# EAGLE board driver_ckt_led_v2 (EAGLE 6.6.0)
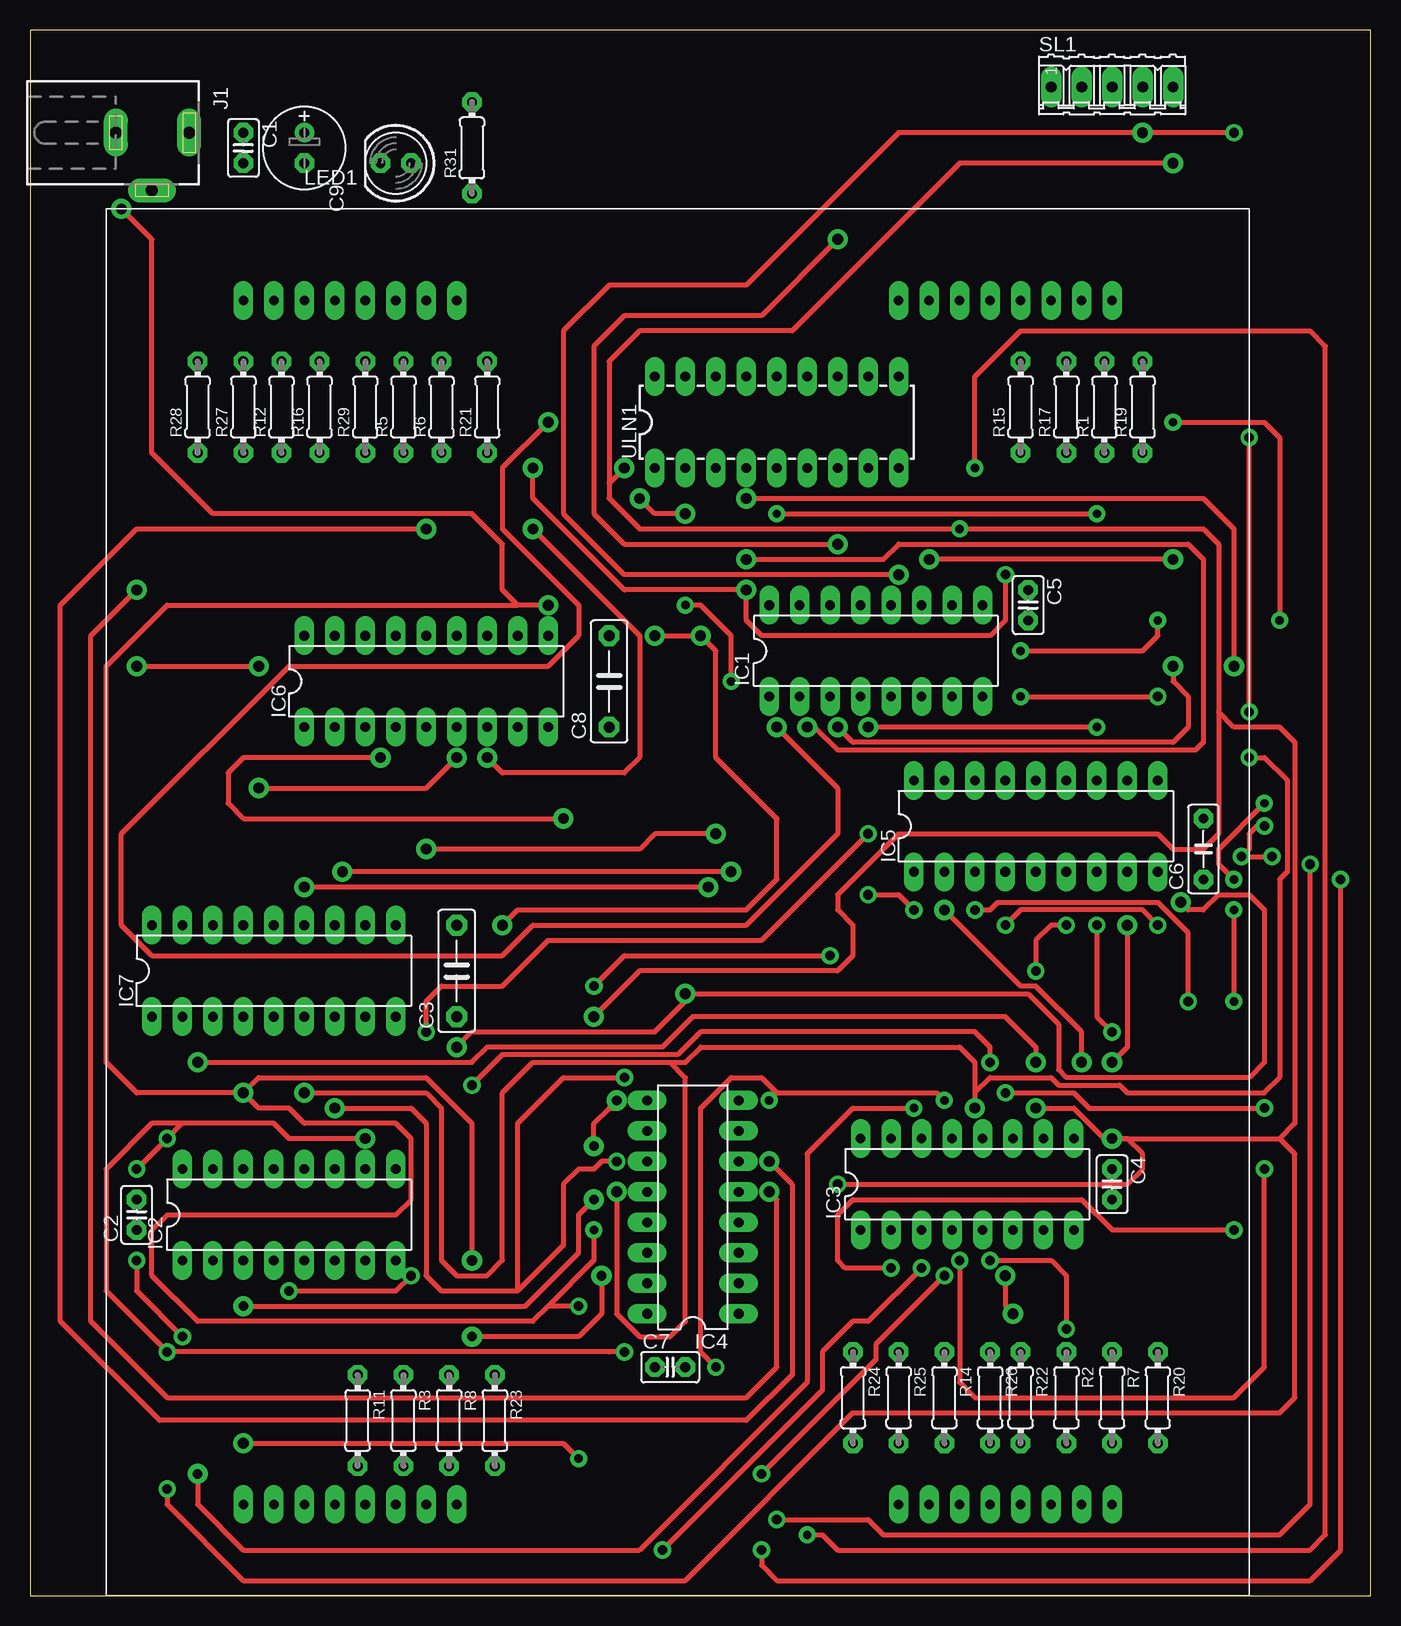
[diagram p0: board, top side]
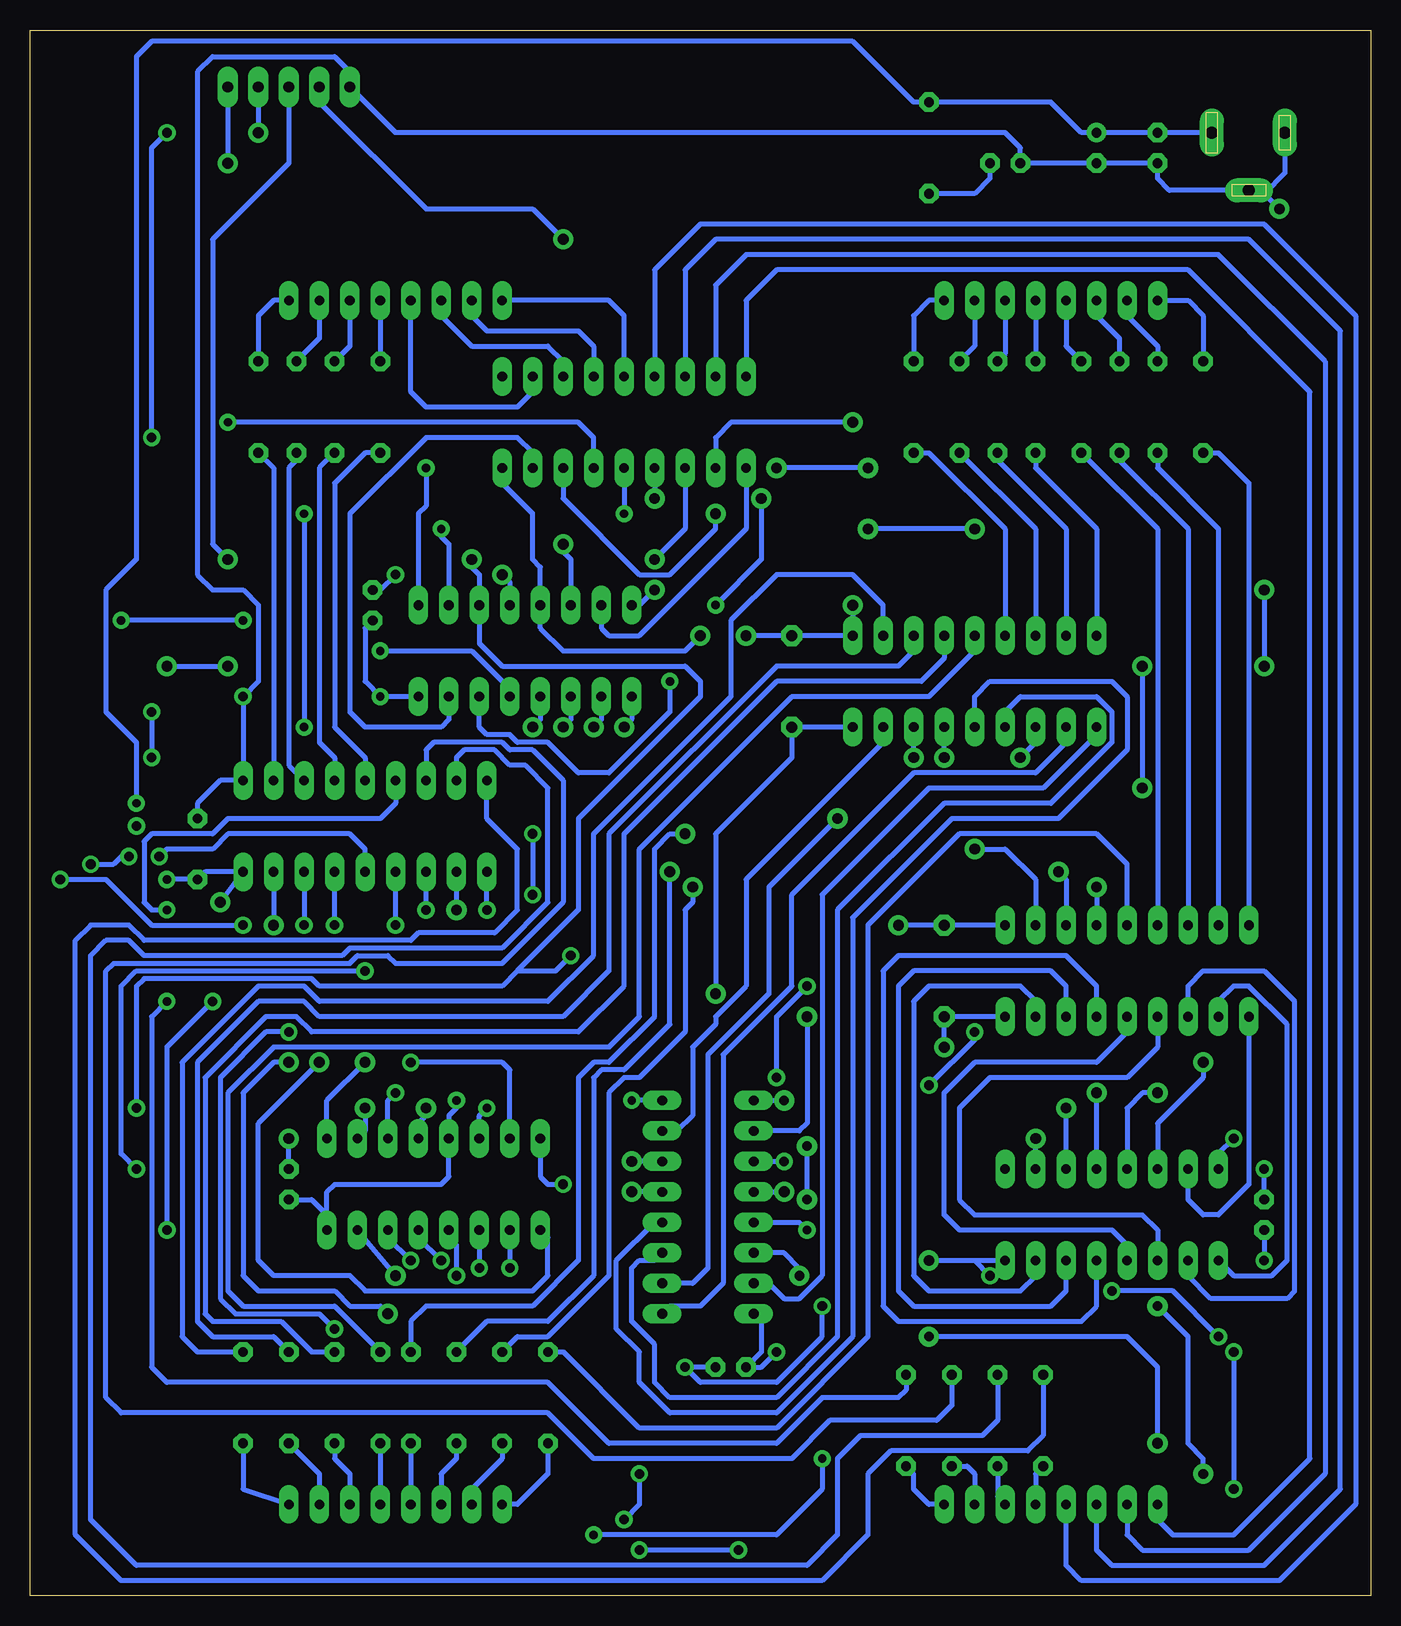
[diagram p1: board, bottom side, seen from below]

Size 111.74 x 130.48 mm. Coordinates in mm from the lower left corner, seen from the top.
Outline: 0,0 111.74,0 111.74,130.48 0,130.48 0,0
Copper layers (1*16): Top 0.035mm / dielectric 1.5mm / Bottom 0.035mm
Design rules "default *": minimum track width 10mil, minimum drill 24mil, track to track 8mil, track to pad 8mil, pad to pad 8mil, via to via 8mil, smd to smd 8mil, copper to edge 40mil, drill to drill 8mil, minimum pad ring 16mil, minimum via ring 8mil, stop-mask expansion 4mil, vias tented up to drill 0mil, thermal gap 10mil

## Footprints (pad centres in the part's own frame; a part is rotated, then mirrored left to right if it is on the bottom)
C025-025X050 = drill 0.813 octagon: 1 -1.27,0; 2 1.27,0
C075-032X103 = drill 0.914 octagon: 1 -3.81,0; 2 3.81,0
C050-025X075 = drill 0.813 octagon: 1 -2.54,0; 2 2.54,0
E2,5-7 = drill 0.813 pad 1.6: + -1.27,0 | drill 0.813 pad 1.6 octagon: - 1.27,0
DIL16 = drill 0.813 long: 1 -8.89,-3.81; 2 -6.35,-3.81; 3 -3.81,-3.81; 4 -1.27,-3.81; 5 1.27,-3.81; 6 3.81,-3.81; 7 6.35,-3.81; 8 8.89,-3.81; 9 8.89,3.81; 10 6.35,3.81; 11 3.81,3.81; 12 1.27,3.81; 13 -1.27,3.81; 14 -3.81,3.81; 15 -6.35,3.81; 16 -8.89,3.81
DIL18 = drill 0.813 long: 1 -10.16,-3.81; 2 -7.62,-3.81; 3 -5.08,-3.81; 4 -2.54,-3.81; 5 0,-3.81; 6 2.54,-3.81; 7 5.08,-3.81; 8 7.62,-3.81; 9 10.16,-3.81; 10 10.16,3.81; 11 7.62,3.81; 12 5.08,3.81; 13 2.54,3.81; 14 0,3.81; 15 -2.54,3.81; 16 -5.08,3.81; 17 -7.62,3.81; 18 -10.16,3.81
DCJ0202 = drill 1 pad 2 long: 1 0,3.1; 2 4.8,0; 3 0,-3
LED5MM = drill 0.813 octagon: A -1.27,0; K 1.27,0
0204/7 = drill 0.813 octagon: 1 -3.81,0; 2 3.81,0
05P = drill 0.914 long: 1 -5.08,0; 2 -2.54,0; 3 0,0; 4 2.54,0; 5 5.08,0
LED_MATRIX = drill 0.8 long: P$1 0,1.27; P$2 2.54,1.27; P$3 5.08,1.27; P$4 7.62,1.27; P$5 10.16,1.27; P$6 12.7,1.27; P$7 15.24,1.27; P$8 17.78,1.27; P$9 54.61,1.27; P$10 57.15,1.27; P$11 59.69,1.27; P$12 62.23,1.27; P$13 64.77,1.27; P$14 67.31,1.27; P$15 69.85,1.27; P$16 72.39,1.27; P$17 17.78,-99.06; P$18 15.24,-99.06; P$19 12.7,-99.06; P$20 10.16,-99.06; P$21 7.62,-99.06; P$22 5.08,-99.06; P$23 2.54,-99.06; P$24 0,-99.06; P$25 54.61,-99.06; P$26 57.15,-99.06; P$27 59.69,-99.06; P$28 62.23,-99.06; P$29 64.77,-99.06; P$30 67.31,-99.06; P$31 69.85,-99.06; P$32 72.39,-99.06

## Placement (x,y rotation side)
C1  0.1uF  [C025-025X050]  17.78,120.65 270 top
C2  [C025-025X050]  8.89,31.75 90 top
C3  0.1uF  [C075-032X103]  35.56,52.07 90 top
C4  [C025-025X050]  90.17,34.29 270 top
C5  [C025-025X050]  83.19,82.55 270 top
C6  0.1uF  [C050-025X075]  97.79,62.23 90 top
C7  [C025-025X050]  53.34,19.05 0 top
C8  0.1uF  [C075-032X103]  48.26,76.2 90 top
C9  [E2,5-7]  22.86,120.65 270 top
IC1  74HC595N  [DIL16]  70.48,78.74 0 top
IC2  74HC595N  [DIL16]  21.59,31.75 0 top
IC3  74HC595N  [DIL16]  78.11,34.29 0 top
IC4  74HC595N  [DIL16]  55.24,32.38 90 top
IC5  UDN2981A  [DIL18]  83.82,64.14 0 top
IC6  UDN2981A  [DIL18]  33.02,76.2 0 top
IC7  UDN2981A  [DIL18]  20.32,52.07 0 top
J1  DCJ0202  [DCJ0202]  10.16,121.92 270 top
LED1  [LED5MM]  30.48,119.38 180 top
R1  47  [0204/7]  89.53,99.06 90 top
R2  47  [0204/7]  86.36,16.51 270 top
R3  47  [0204/7]  31.11,14.61 270 top
R5  47  [0204/7]  31.11,99.06 90 top
R6  47  [0204/7]  34.29,99.06 90 top
R7  47  [0204/7]  90.17,16.51 270 top
R8  47  [0204/7]  34.92,14.61 270 top
R11  47  [0204/7]  27.3,14.61 270 top
R12  47  [0204/7]  20.95,99.06 90 top
R14  47  [0204/7]  76.2,16.51 270 top
R15  47  [0204/7]  82.55,99.06 90 top
R16  47  [0204/7]  24.13,99.06 90 top
R17  47  [0204/7]  86.36,99.06 90 top
R19  47  [0204/7]  92.71,99.06 90 top
R20  47  [0204/7]  93.98,16.51 270 top
R21  47  [0204/7]  38.1,99.06 90 top
R22  47  [0204/7]  82.55,16.51 270 top
R23  47  [0204/7]  38.73,14.61 270 top
R24  47  [0204/7]  68.58,16.51 270 top
R25  47  [0204/7]  72.39,16.51 270 top
R26  47  [0204/7]  80.01,16.51 270 top
R27  47  [0204/7]  17.78,99.06 90 top
R28  47  [0204/7]  13.97,99.06 90 top
R29  47  [0204/7]  27.94,99.06 90 top
R31  2.2K  [0204/7]  36.83,120.65 90 top
SL1  [05P]  90.17,125.73 0 top
U$1  LED_MATRIX  [LED_MATRIX]  17.78,106.68 0 top
ULN1  [DIL18]  62.23,97.79 0 top

## Library data of the parts
C1 = resistor
C2-C9 R1-R3 R5-R8 R11 R12 R14-R17 R19-R29 R31 = rcl
IC1-IC4 = 74xx-eu
IC5-IC7 = uln-udn
J1 = con-jack; OC_FARNELL: unknown; OC_NEWARK: unknown
LED1 = led
SL1 = con-amp-quick; OC_FARNELL: unknown; OC_NEWARK: unknown
U$1 = led_matrix
ULN1 = SparkFun-PowerIC

## Nets
3V3: C2.2 C4.1 C5.1 C7.1 IC1.10 IC1.16 IC2.10 IC2.16 IC3.10 IC3.16 IC4.10 IC4.16 SL1.5
9V: C1.1 C3.1 C6.1 C8.1 C9.+ IC5.9 IC6.9 IC7.9 J1.1 R31.2
B1: IC2.15 IC7.1
B2: IC2.1 IC7.2
B3: IC2.2 IC7.3
B4: IC2.3 IC7.4
B5: IC2.4 IC7.5
B6: IC2.5 IC7.6
B7: IC2.6 IC7.7
B8: IC2.7 IC7.8
DATA1: IC1.9 IC4.14
DATA2: IC3.14 IC4.9
DATA3: IC2.14 IC3.9
G1: IC3.15 IC5.1
G2: IC3.1 IC5.2
G3: IC3.2 IC5.3
G4: IC3.3 IC5.4
G5: IC3.4 IC5.5
G6: IC3.5 IC5.6
G7: IC3.6 IC5.7
G8: IC3.7 IC5.8
GND: C1.2 C2.1 C3.2 C4.2 C5.2 C6.2 C7.2 C8.2 C9.- IC1.8 IC1.13 IC2.8 IC2.13 IC3.8 IC3.13 IC4.8 IC4.13 IC5.10 IC6.10 IC7.10 J1.2 J1.3 LED1.K SL1.1 ULN1.9
GND1: IC1.15 ULN1.1
GND2: IC1.1 ULN1.2
GND3: IC1.2 ULN1.3
GND4: IC1.3 ULN1.4
GND5: IC1.4 ULN1.5
GND6: IC1.5 ULN1.6
GND7: IC1.6 ULN1.7
GND8: IC1.7 ULN1.8
N$1: IC5.11 R19.1
N$6: LED1.A R31.1
N$46: IC6.18 R29.1
N$47: IC6.17 R5.1
N$48: IC6.16 R6.1
N$49: IC6.15 R21.1
N$50: IC6.14 R22.1
N$51: IC6.13 R2.1
N$52: IC6.12 R7.1
N$53: IC6.11 R20.1
N$63: IC5.18 R11.1
N$64: IC5.17 R3.1
N$65: IC5.16 R8.1
N$66: IC5.15 R23.1
N$67: IC5.14 R15.1
N$68: IC5.13 R17.1
N$69: IC5.12 R1.1
N$80: IC7.18 R28.1
N$81: IC7.17 R27.1
N$82: IC7.16 R12.1
N$83: IC7.15 R16.1
N$84: IC7.14 R24.1
N$85: IC7.13 R25.1
N$86: IC7.12 R14.1
N$87: IC7.11 R26.1
OP_B1: R28.2 U$1.P$1
OP_B2: R27.2 U$1.P$2
OP_B3: R12.2 U$1.P$3
OP_B4: R16.2 U$1.P$4
OP_B5: R24.2 U$1.P$25
OP_B6: R25.2 U$1.P$26
OP_B7: R14.2 U$1.P$27
OP_B8: R26.2 U$1.P$28
OP_G1: R11.2 U$1.P$20
OP_G2: R3.2 U$1.P$19
OP_G3: R8.2 U$1.P$18
OP_G4: R23.2 U$1.P$17
OP_G5: R15.2 U$1.P$13
OP_G6: R17.2 U$1.P$14
OP_G7: R1.2 U$1.P$15
OP_G8: R19.2 U$1.P$16
OP_GND1: U$1.P$24 ULN1.18
OP_GND2: U$1.P$23 ULN1.17
OP_GND3: U$1.P$22 ULN1.16
OP_GND4: U$1.P$21 ULN1.15
OP_GND5: U$1.P$9 ULN1.14
OP_GND6: U$1.P$10 ULN1.13
OP_GND7: U$1.P$11 ULN1.12
OP_GND8: U$1.P$12 ULN1.11
OP_R1: R29.2 U$1.P$5
OP_R2: R5.2 U$1.P$6
OP_R3: R6.2 U$1.P$7
OP_R4: R21.2 U$1.P$8
OP_R5: R22.2 U$1.P$29
OP_R6: R2.2 U$1.P$30
OP_R7: R7.2 U$1.P$31
OP_R8: R20.2 U$1.P$32
R1: IC4.15 IC6.1
R2: IC4.1 IC6.2
R3: IC4.2 IC6.3
R4: IC4.3 IC6.4
R5: IC4.4 IC6.5
R6: IC4.5 IC6.6
R7: IC4.6 IC6.7
R8: IC4.7 IC6.8
SERIAL_DATA: IC1.14 SL1.2
SHCP: IC1.11 IC2.11 IC3.11 IC4.11 SL1.3
STCP: IC1.12 IC2.12 IC3.12 IC4.12 SL1.4

## Tracks (layer width: path | path; a pad name or v marks a point on that pad's centre or on a via)
3V3  (via drill 0.7 pad 1.42, 0.8 pad 1.42, 0.9 pad 1.68)
  Top 0.406: 48.26,92.71 48.26,91.44 50.8,88.9 v77.47,88.9 97.79,88.9 99.06,87.63 99.06,73.66 | v27.94,38.1 21.59,38.1 20.32,39.37 12.7,39.37 | 12.7,39.37 10.16,39.37 6.35,35.56 6.35,25.4 v11.43,20.32 v49.53,20.32 48.26,20.32 | v41.91,93.98 41.91,91.44 49.53,83.82 v59.69,83.82 59.69,81.28 60.96,80.01 80.01,80.01 81.28,81.28 v81.28,85.09 | v49.53,93.98 48.26,92.71 | v8.89,35.56 v11.43,38.1 12.7,39.37 | v83.82,40.64 87,40.64 89.53,38.1 v90.17,38.1 | v95.25,119.38 77.47,119.38 63.5,105.41 50.8,105.41 48.26,102.87 48.26,92.71 | 99.06,73.66 99.06,63.5 97.79,62.23 95.25,62.23 93.98,63.5 72.39,63.5 67.31,58.42 67.31,57.15 68.58,55.88 68.58,53.34 67.31,52.07 50.8,52.07 v46.99,48.26 | 99.06,73.66 100.33,72.39 104.14,72.39 105.41,71.12 105.41,39.37 104.14,38.1 | v67.31,34.29 91.44,34.29 92.71,35.56 92.71,36.83 91.44,38.1 v90.17,38.1 | v90.17,38.1 104.14,38.1 | v11.43,8.89 11.43,7.62 17.78,1.27 54.61,1.27 68.58,15.24 104.14,15.24 105.41,16.51 105.41,36.83 104.14,38.1
  Bottom 0.406: SL1.5 v95.25,119.38 | IC2.10 v27.94,38.1 | C4.1 v90.17,38.1 | v83.82,40.64 83.82,38.73 IC3.10 | v77.47,88.9 77.47,88.27 76.83,87.63 IC1.10 | IC1.16 60.96,82.55 v59.69,83.82 | v41.91,93.98 v49.53,93.98 | C5.1 82.55,83.82 v81.28,85.09 | C2.2 v8.89,35.56 | v11.43,38.1 12.7,36.83 IC2.16 | v46.99,48.26 46.99,39.37 47.62,38.73 IC4.10 | IC3.16 69.22,34.92 68.58,34.29 v67.31,34.29 | IC4.16 50.8,22.86 50.8,20.32 C7.1 50.8,19.05 v49.53,20.32 | v11.43,20.32 v11.43,8.89
9V  (via drill 0.7 pad 1.42, 0.9 pad 1.68)
  Top 0.406: v35.56,45.72 36.83,46.99 52.07,46.99 54.61,49.53 v54.61,50.16 83.19,50.16 85.72,47.62 85.72,43.81 86.36,43.18 101.6,43.18 102.87,44.45 102.87,57.15 101.6,58.42 99.06,58.42 97.79,57.15 96.52,57.15 v95.89,57.78 | v100.33,59.69 99.06,60.96 99.06,62.23 v102.87,66.04
  Bottom 0.406: IC7.9 C3.1 v35.56,45.72 | IC6.9 C8.1 48.26,69.85 54.61,63.5 v54.61,50.16 | J1.1 C1.1 C9.+ 24.13,121.92 26.67,124.46 R31.2 38.1,124.46 43.18,129.54 101.6,129.54 102.87,128.27 102.87,86.36 105.41,83.82 105.41,73.66 102.87,71.12 v102.87,66.04 | v95.89,57.78 IC5.9 97.16,60.33 C6.1 v100.33,59.69
B1
  Bottom 0.406: IC7.1 10.16,34.29 12.7,31.75 13.97,31.75 15.24,33.02 IC2.15
B2
  Bottom 0.406: IC2.1 11.43,26.67 8.26,26.67 6.99,27.94 6.99,47.62 10.16,50.8 11.43,50.8 12.7,49.53 IC7.2
B3
  Bottom 0.406: IC2.2 15.24,26.67 13.34,24.77 6.99,24.77 6.35,25.4 6.35,49.53 8.89,52.07 13.97,52.07 15.24,50.8 IC7.3
B4
  Bottom 0.406: IC7.4 17.78,45.72 20.32,43.18 31.75,43.18 34.29,40.64 34.29,33.02 33.02,31.75 19.05,31.75 17.78,30.48 IC2.3
B5
  Bottom 0.406: IC7.5 20.32,46.99 22.86,44.45 33.02,44.45 35.56,41.91 35.56,31.75 34.29,30.48 21.59,30.48 20.32,29.21 IC2.4
B6
  Bottom 0.406: IC2.5 22.86,24.13 24.13,22.86 39.37,22.86 40.64,24.13 40.64,52.07 39.37,53.34 25.4,53.34 22.86,50.8 IC7.6
B7
  Bottom 0.406: IC2.6 25.4,25.4 26.67,24.13 38.1,24.13 39.37,25.4 39.37,50.8 38.1,52.07 26.67,52.07 25.4,50.8 IC7.7
B8
  Bottom 0.406: IC2.7 27.94,26.67 29.21,25.4 36.83,25.4 38.1,26.67 38.1,49.53 36.83,50.8 29.21,50.8 27.94,49.53 IC7.8
DATA1  (via drill 0.7 pad 1.42, 0.8 pad 1.68, 0.9 pad 1.68)
  Top 0.406: v78.74,93.98 78.74,101.6 82.55,105.41 106.68,105.41 107.95,104.14 107.95,5.08 106.68,3.81 67.31,3.81 66.04,5.08 v64.77,5.08 | v47.62,26.67 47.62,23.5 45.72,21.59 v36.83,21.59 | v17.78,12.7 44.45,12.7 v45.72,11.43
  Bottom 0.406: v17.78,12.7 17.78,19.05 20.32,21.59 v36.83,21.59 | v47.62,26.67 47.62,27.3 48.9,28.57 IC4.14 | v78.74,93.98 78.74,90.81 79.38,90.17 IC1.9 | v45.72,11.43 45.72,8.89 49.53,5.08 v64.77,5.08
DATA2  (via drill 0.7 pad 1.42, 0.8 pad 1.68)
  Top 0.406: v13.97,10.16 13.97,7.62 17.78,3.81 50.8,3.81 64.77,17.78 64.77,36.83 68.58,40.64 v73.66,40.64 | v46.99,33.02 45.72,31.75 45.72,28.57 41.27,24.13 v17.78,24.13 | v46.99,37.47 46.99,39.37 48.26,40.64 48.9,40.64 49.53,41.27 v48.9,41.27
  Bottom 0.406: IC4.9 v48.9,41.27 | v46.99,33.02 v46.99,37.47 | IC3.14 74.3,40.01 v73.66,40.64 | v13.97,10.16 13.97,11.43 15.24,12.7 15.24,21.59 v17.78,24.13
DATA3  (via drill 0.9 pad 1.68)
  Top 0.406: v83.82,44.45 83.82,45.72 81.28,48.26 55.24,48.26 52.7,45.72 38.1,45.72 36.83,44.45 v13.97,44.45
  Bottom 0.406: v13.97,44.45 13.97,43.18 17.78,39.37 IC2.14 | v83.82,44.45 87,41.27 IC3.9
G1  (via drill 0.8 pad 1.42)
  Top 0.406: v80.01,44.45 80.01,45.72 78.74,46.99 55.88,46.99 53.98,45.09 39.37,45.09 v36.83,42.55 | v69.85,58.42 72.39,58.42 v73.66,57.15 | v33.02,46.99 33.02,49.53 34.29,50.8 39.37,50.8 43.18,54.61 60.96,54.61 v69.85,63.5
  Bottom 0.406: IC3.15 71.75,43.81 72.39,44.45 v80.01,44.45 | v69.85,63.5 v69.85,58.42 | v73.66,57.15 IC5.1 | v33.02,46.99 33.02,46.35 v36.83,42.55
G2  (via drill 0.9 pad 1.68)
  Top 0.406: v87.63,44.45 87.63,46.99 83.82,50.8 82.55,50.8 v76.2,57.15
  Bottom 0.406: IC5.2 v76.2,57.15 | IC3.1 68.58,29.84 68.58,26.67 69.85,25.4 83.82,25.4 85.09,26.67 91.44,26.67 92.71,27.94 92.71,39.37 v87.63,44.45
G3  (via drill 0.8 pad 1.42)
  Top 0.406: v71.75,27.3 67.94,27.3 67.31,27.94 67.31,31.75 68.58,33.02 87.63,33.02 90.17,30.48 v100.33,30.48 | v96.52,49.53 96.52,55.24 93.98,57.78 80.64,57.78 80.01,57.15 v78.74,57.15
  Bottom 0.406: IC3.2 v71.75,27.3 | v96.52,49.53 100.33,45.72 v100.33,30.48 | v78.74,57.15 IC5.3
G4  (via drill 0.8 pad 1.42)
  Top 0.406: v74.3,27.3 69.85,22.86 68.58,22.86 66.04,20.32 66.04,17.14 v52.7,3.81 | v93.98,55.88 92.71,57.15 82.55,57.15 v81.28,55.88 | v60.96,3.81 60.96,2.54 62.23,1.27 106.68,1.27 109.22,3.81 v109.22,59.69
  Bottom 0.406: IC3.3 v74.3,27.3 | v52.7,3.81 v60.96,3.81 | v109.22,59.69 105.41,59.69 101.6,55.88 v93.98,55.88 | v81.28,55.88 IC5.4
G5  (via drill 0.8 pad 1.42)
  Top 0.406: v62.23,6.35 69.85,6.35 71.12,5.08 104.14,5.08 106.68,7.62 v106.68,60.96 | v102.87,64.14 102.23,64.14 101.6,63.5 101.6,62.23 v100.97,61.59 v103.5,61.59 | v60.96,10.16 70.48,19.68 70.48,20.95 v76.2,26.67
  Bottom 0.406: v100.97,61.59 100.33,62.23 96.52,62.23 95.25,63.5 85.09,63.5 83.82,62.23 IC5.5 | IC3.4 76.83,29.84 76.2,29.21 v76.2,26.67 | v106.68,60.96 104.78,60.96 104.14,61.59 v103.5,61.59 | v60.96,10.16 60.96,7.62 v62.23,6.35
G6  (via drill 0.8 pad 1.42)
  Top 0.406: v77.47,27.94 77.47,17.78 78.74,16.51 100.33,16.51 102.87,19.05 v102.87,35.56 | v86.36,55.88 85.09,55.88 83.82,54.61 v83.82,52.07
  Bottom 0.406: IC3.5 79.38,29.84 v77.47,27.94 | v86.36,55.88 IC5.6 | v102.87,35.56 104.14,36.83 104.14,50.8 102.87,52.07 v83.82,52.07
G7  (via drill 0.8 pad 1.42)
  Top 0.406: v90.17,46.99 88.9,48.26 v88.9,55.88 | v80.01,27.94 85.09,27.94 86.36,26.67 v86.36,22.23
  Bottom 0.406: v90.17,46.99 92.08,46.99 95.89,43.18 95.89,24.77 94.61,23.5 87.63,23.5 v86.36,22.23 | IC3.6 81.92,29.84 v80.01,27.94 | IC5.7 v88.9,55.88
G8  (via drill 0.9 pad 1.68)
  Top 0.406: v81.28,26.67 81.28,24.13 v81.92,23.5 | v91.44,55.88 91.44,45.72 v90.17,44.45
  Bottom 0.406: IC5.8 v91.44,55.88 | v81.28,26.67 IC3.7 | v81.92,23.5 82.55,24.13 85.09,24.13 86.36,25.4 92.71,25.4 93.98,26.67 93.98,41.91 91.44,44.45 v90.17,44.45
GND  (via drill 0.7 pad 1.42, 0.8 pad 1.42, 0.9 pad 1.68)
  Top 0.406: v36.83,27.94 36.83,39.37 33.02,43.18 19.05,43.18 v17.78,41.91 | v52.07,80.01 v55.88,80.01 57.15,78.74 57.15,69.85 62.23,64.77 62.23,59.69 59.69,57.15 40.64,57.15 v39.37,55.88 | v17.78,41.91 8.89,41.91 6.35,44.45 6.35,77.47 11.43,82.55 40.64,82.55 | v7.62,115.57 10.16,113.03 10.16,95.25 15.24,90.17 36.83,90.17 39.37,87.63 39.37,83.82 40.64,82.55 | v61.59,41.27 62.23,41.91 | 62.23,41.91 75.56,41.91 v76.2,41.27 | v17.78,41.91 19.05,40.64 21.59,40.64 22.86,39.37 30.48,39.37 31.75,38.1 31.75,33.02 30.48,31.75 11.43,31.75 10.16,30.48 10.16,26.67 13.97,22.86 41.91,22.86 43.18,24.13 | v43.18,82.55 40.64,82.55 | v8.89,27.94 8.89,25.4 v12.7,21.59 | v21.59,25.4 30.48,25.4 v31.75,26.67 | v57.15,19.05 55.88,20.32 55.88,40.64 58.42,43.18 60.96,43.18 62.23,41.91 | v46.99,30.48 46.99,27.94 43.18,24.13 | v82.55,74.93 v93.98,74.93 | v45.72,24.13 43.18,24.13
  Bottom 0.406: IC7.10 C3.2 v39.37,55.88 | C6.2 97.79,66.04 95.89,67.94 IC5.10 v93.98,74.93 92.71,76.2 92.71,82.55 93.98,83.82 96.52,83.82 97.79,85.09 97.79,127 96.52,128.27 86.36,128.27 85.09,127 SL1.1 81.28,121.92 30.48,121.92 29.21,120.65 LED1.K C9.- C1.2 17.78,118.11 16.79,117.12 J1.2 9.88,116.84 8.89,116.84 | v43.18,82.55 IC6.10 C8.2 v52.07,80.01 | ULN1.9 72.39,92.71 69.85,90.17 69.85,86.36 69.22,85.72 IC1.13 69.22,80.64 67.31,78.74 57.15,78.74 v55.88,80.01 | v36.83,27.94 33.02,27.94 | 33.02,27.94 IC2.8 | v17.78,41.91 19.05,41.91 20.32,40.64 IC2.13 | IC4.8 v61.59,41.27 | IC3.8 87,31.75 | 87,31.75 87,33.66 86.36,34.29 77.47,34.29 76.83,34.92 IC3.13 76.83,40.01 76.2,40.64 v76.2,41.27 | C4.2 88.27,33.02 87,31.75 | C5.2 83.82,80.64 83.82,76.2 v82.55,74.93 IC1.8 | C2.1 v8.89,27.94 | v12.7,21.59 16.51,25.4 v21.59,25.4 | v31.75,26.67 33.02,27.94 | C7.2 v57.15,19.05 55.88,17.78 49.53,17.78 45.72,21.59 v45.72,24.13 | IC4.13 47.62,31.11 v46.99,30.48 | J1.3 7.16,118.57 8.89,116.84 | 8.89,116.84 v7.62,115.57
GND1
  Bottom 0.406: ULN1.1 52.07,88.9 60.96,80.01 63.5,80.01 64.14,80.64 IC1.15
GND2  (via drill 0.9 pad 1.68)
  Top 0.406: v62.23,72.39 67.31,67.31 67.31,63.5 59.69,55.88 41.91,55.88 39.37,53.34 10.16,53.34 7.62,55.88 7.62,63.5 21.59,77.47 43.18,77.47 45.72,80.01 45.72,82.55 39.37,88.9 39.37,93.98 v43.18,97.79
  Bottom 0.406: v43.18,97.79 53.34,97.79 54.61,96.52 ULN1.2 | IC1.1 61.59,73.03 v62.23,72.39
GND3  (via drill 0.9 pad 1.68)
  Top 0.406: v59.69,86.36 71.12,86.36 72.39,87.63 96.52,87.63 97.79,86.36 97.79,71.12 97.16,70.48 67.31,70.48 65.41,72.39 v64.77,72.39
  Bottom 0.406: ULN1.3 57.15,88.9 v59.69,86.36 | IC1.2 64.14,73.03 v64.77,72.39
GND4  (via drill 0.9 pad 1.68)
  Top 0.406: v59.69,91.44 97.79,91.44 100.33,88.9 v100.33,77.47 | v95.25,77.47 95.25,76.2 96.52,74.93 96.52,72.39 95.25,71.12 68.58,71.12 v67.31,72.39
  Bottom 0.406: ULN1.4 v59.69,91.44 | v100.33,77.47 v95.25,77.47 | IC1.3 66.67,73.03 v67.31,72.39
GND5  (via drill 0.7 pad 1.42, 0.9 pad 1.68)
  Top 0.406: v62.23,90.17 v88.9,90.17 | v88.9,72.39 v69.85,72.39
  Bottom 0.406: ULN1.5 v62.23,90.17 | v88.9,90.17 v88.9,72.39 | IC1.4 69.22,73.03 v69.85,72.39
GND6  (via drill 0.7 pad 1.42)
  Top 0.406: v95.25,97.79 102.87,97.79 104.14,96.52 v104.14,81.28 | v82.55,78.74 92.71,78.74 93.98,80.01 v93.98,81.28
  Bottom 0.406: ULN1.6 64.77,96.52 66.04,97.79 v95.25,97.79 | v82.55,78.74 74.93,78.74 71.75,75.56 IC1.5 | v93.98,81.28 v104.14,81.28
GND7  (via drill 0.7 pad 1.42, 0.9 pad 1.68)
  Top 0.406: v58.42,76.2 58.42,80.01 55.88,82.55 v54.61,82.55 | v54.61,90.17 52.07,90.17 v50.8,91.44
  Bottom 0.406: ULN1.7 67.31,91.44 60.96,85.09 58.42,85.09 54.61,88.9 v54.61,90.17 | v58.42,76.2 58.42,73.66 63.5,68.58 66.04,68.58 68.58,71.12 71.12,71.12 71.75,71.75 73.66,71.75 74.3,72.39 IC1.6 | v50.8,91.44 50.8,86.36 v54.61,82.55
GND8
  Bottom 0.406: ULN1.8 69.85,95.25 71.12,96.52 78.74,96.52 85.09,90.17 85.09,73.66 83.82,72.39 77.47,72.39 76.83,73.03 IC1.7
N$1
  Bottom 0.406: IC5.11 91.44,93.98 R19.1
N$6
  Bottom 0.406: LED1.A 31.75,118.11 33.02,116.84 R31.1
N$46
  Bottom 0.406: R29.1 27.94,93.98 22.86,88.9 IC6.18
N$47
  Bottom 0.406: R5.1 31.11,94.61 25.4,88.9 IC6.17
N$48
  Bottom 0.406: R6.1 27.94,88.9 IC6.16
N$49
  Bottom 0.406: R21.1 36.83,95.25 30.48,88.9 IC6.15
N$50
  Bottom 0.406: IC6.14 33.02,78.74 36.83,74.93 48.26,74.93 60.96,62.23 60.96,48.26 63.5,45.72 91.44,45.72 95.25,41.91 95.25,25.4 93.98,24.13 86.36,24.13 R22.1
N$51
  Bottom 0.406: R2.1 88.27,20.32 90.81,22.86 96.52,22.86 97.16,23.5 97.16,43.18 92.08,48.26 89.53,48.26 88.27,46.99 66.04,46.99 62.23,50.8 62.23,63.5 49.53,76.2 37.47,76.2 35.56,78.11 IC6.13
N$52
  Bottom 0.406: IC6.12 38.1,78.74 39.37,77.47 49.53,77.47 63.5,63.5 63.5,52.07 67.31,48.26 87.63,48.26 88.9,49.53 92.71,49.53 97.79,44.45 97.79,22.86 96.52,21.59 91.44,21.59 R7.1
N$53
  Bottom 0.406: IC6.11 40.64,82.55 43.18,85.09 49.53,85.09 53.34,81.28 53.34,74.93 64.77,63.5 64.77,53.34 68.58,49.53 87.63,49.53 88.9,50.8 92.71,50.8 99.06,44.45 99.06,21.59 97.79,20.32 R20.1
N$63
  Bottom 0.406: R11.1 27.3,13.34 28.57,12.06 40.01,12.06 41.91,10.16 41.91,5.08 45.72,1.27 104.14,1.27 107.95,5.08 107.95,54.61 106.68,55.88 103.5,55.88 102.23,54.61 80.01,54.61 79.38,55.24 73.03,55.24 71.12,57.15 71.12,62.23 73.66,64.77 IC5.18
N$64
  Bottom 0.406: R3.1 31.11,14.61 32.38,13.34 42.55,13.34 44.45,11.43 44.45,5.08 46.99,2.54 102.87,2.54 106.68,6.35 106.68,53.34 105.41,54.61 103.5,54.61 102.23,53.34 85.72,53.34 85.09,53.98 72.39,53.98 68.58,57.78 68.58,67.31 70.48,69.22 71.75,69.22 73.03,70.48 75.56,70.48 76.2,69.85 IC5.17
N$65
  Bottom 0.406: R8.1 34.92,15.88 36.2,14.61 45.09,14.61 48.26,11.43 64.77,11.43 68.58,15.24 104.14,15.24 105.41,16.51 105.41,52.07 104.78,52.7 85.09,52.7 84.45,53.34 81.92,53.34 81.28,52.7 72.39,52.7 67.31,57.78 67.31,67.94 69.85,70.48 71.75,70.48 72.39,71.12 78.11,71.12 78.74,70.48 IC5.16
N$66  (via drill 0.7 pad 1.42)
  Top 0.406: v100.33,57.15 v100.33,49.53
  Bottom 0.406: IC5.15 81.28,66.04 82.55,64.77 95.25,64.77 96.52,63.5 101.6,63.5 102.23,62.87 102.23,57.78 101.6,57.15 v100.33,57.15 | R23.1 38.73,17.14 39.37,16.51 45.72,16.51 49.53,12.7 63.5,12.7 68.58,17.78 100.33,17.78 101.6,19.05 101.6,48.26 v100.33,49.53
N$67
  Bottom 0.406: R15.1 83.82,95.25 86.36,92.71 86.36,72.39 83.82,69.85 IC5.14
N$68
  Bottom 0.406: R17.1 87.63,93.98 87.63,71.12 86.36,69.85 IC5.13
N$69
  Bottom 0.406: R1.1 89.53,94.61 90.17,93.98 90.17,69.22 IC5.12
N$80
  Bottom 0.406: R28.1 12.7,95.25 10.16,92.71 IC7.18
N$81
  Bottom 0.406: R27.1 17.78,93.98 12.7,88.9 IC7.17
N$82
  Bottom 0.406: R12.1 20.95,94.61 15.24,88.9 IC7.16
N$83
  Bottom 0.406: R16.1 17.78,88.9 IC7.15
N$84
  Bottom 0.406: IC7.14 20.32,60.96 22.86,63.5 34.29,63.5 41.91,55.88 41.91,21.59 49.53,13.97 60.96,13.97 67.31,20.32 R24.1
N$85  (via drill 0.9 pad 1.68)
  Top 0.406: v56.52,59.05 v22.86,59.05
  Bottom 0.406: v22.86,59.05 IC7.13 | R25.1 71.12,21.59 68.58,21.59 63.5,26.67 63.5,41.91 62.23,43.18 60.96,43.18 57.15,46.99 57.15,57.15 56.52,57.78 v56.52,59.05
N$86  (via drill 0.9 pad 1.68)
  Top 0.406: v58.42,60.33 v26.04,60.33
  Bottom 0.406: v58.42,60.33 58.42,47.62 62.23,43.81 64.14,43.81 64.77,43.18 64.77,26.67 68.58,22.86 73.66,22.86 R14.1 | v26.04,60.33 25.4,59.69 IC7.12
N$87  (via drill 0.9 pad 1.68)
  Top 0.406: v57.15,63.5 52.07,63.5 50.8,62.23 v33.02,62.23
  Bottom 0.406: v33.02,62.23 30.48,62.23 27.94,59.69 IC7.11 | R26.1 80.01,22.86 78.74,24.13 69.85,24.13 66.04,27.94 66.04,43.18 64.77,44.45 63.5,44.45 59.69,48.26 59.69,62.23 58.42,63.5 v57.15,63.5
OP_B1
  Bottom 0.406: U$1.P$1 15.24,107.95 13.97,106.68 R28.2
OP_B2
  Bottom 0.406: R27.2 17.78,104.14 20.32,106.68 U$1.P$2
OP_B3
  Bottom 0.406: R12.2 20.95,104.78 22.86,106.68 U$1.P$3
OP_B4
  Bottom 0.406: U$1.P$4 25.4,104.14 R16.2
OP_B5
  Bottom 0.406: R24.2 68.58,10.16 71.12,7.62 U$1.P$25
OP_B6
  Bottom 0.406: R25.2 72.39,11.43 74.93,8.89 U$1.P$26
OP_B7
  Bottom 0.406: R14.2 76.2,11.43 77.47,10.16 U$1.P$27
OP_B8
  Bottom 0.406: R26.2 U$1.P$28
OP_G1
  Bottom 0.406: R11.2 27.94,10.16 U$1.P$20
OP_G2
  Bottom 0.406: R3.2 31.11,8.26 U$1.P$19
OP_G3
  Bottom 0.406: R8.2 33.66,10.79 33.02,10.16 U$1.P$18
OP_G4
  Bottom 0.406: U$1.P$17 36.83,7.62 38.1,8.89 38.1,10.16 R23.2
OP_G5
  Bottom 0.406: U$1.P$13 R15.2
OP_G6
  Bottom 0.406: U$1.P$14 85.09,104.14 R17.2
OP_G7
  Bottom 0.406: U$1.P$15 87.63,104.78 R1.2
OP_G8
  Bottom 0.406: U$1.P$16 91.44,107.95 92.71,106.68 R19.2
OP_GND1
  Bottom 0.406: ULN1.18 52.07,107.95 49.53,110.49 15.24,110.49 5.08,100.33 5.08,11.43 11.43,5.08 16.51,5.08 17.78,6.35 U$1.P$24
OP_GND2
  Bottom 0.406: ULN1.17 54.61,109.22 52.07,111.76 12.7,111.76 3.81,102.87 3.81,10.16 10.16,3.81 19.05,3.81 20.32,5.08 U$1.P$23
OP_GND3
  Bottom 0.406: ULN1.16 57.15,110.49 54.61,113.03 10.16,113.03 2.54,105.41 2.54,8.89 8.89,2.54 21.59,2.54 22.86,3.81 U$1.P$22
OP_GND4
  Bottom 0.406: ULN1.15 59.69,110.49 55.88,114.3 8.89,114.3 1.27,106.68 1.27,7.62 7.62,1.27 24.13,1.27 25.4,2.54 U$1.P$21
OP_GND5
  Bottom 0.406: ULN1.14 62.23,106.68 63.5,107.95 U$1.P$9
OP_GND6
  Bottom 0.406: U$1.P$10 74.93,106.68 73.66,105.41 66.04,105.41 64.77,104.14 ULN1.13
OP_GND7
  Bottom 0.406: U$1.P$11 77.47,106.68 74.93,104.14 68.58,104.14 67.31,102.87 ULN1.12 67.31,100.33
OP_GND8
  Bottom 0.406: ULN1.11 69.85,100.33 71.12,99.06 78.74,99.06 80.01,100.33 U$1.P$12
OP_R1
  Bottom 0.406: U$1.P$5 R29.2
OP_R2
  Bottom 0.406: U$1.P$6 30.48,103.5 R5.2
OP_R3
  Bottom 0.406: U$1.P$7 33.02,104.14 R6.2
OP_R4
  Bottom 0.406: R21.2 38.1,106.68 36.83,107.95 U$1.P$8
OP_R5
  Bottom 0.406: R22.2 U$1.P$29
OP_R6
  Bottom 0.406: R2.2 86.36,11.43 85.09,10.16 U$1.P$30
OP_R7
  Bottom 0.406: R7.2 87.63,10.16 U$1.P$31
OP_R8
  Bottom 0.406: R20.2 93.98,8.89 U$1.P$32
R1
  Bottom 0.406: IC6.1 22.86,71.75 27.3,67.31 36.83,67.31 45.72,58.42 45.72,26.67 47.62,24.77 48.9,24.77 50.16,26.04 IC4.15
R2
  Bottom 0.406: IC6.2 25.4,71.12 27.94,68.58 38.1,68.58 48.26,58.42 48.26,50.8 53.98,45.09 53.98,26.04 55.88,24.13 58.42,24.13 IC4.1
R3  (via drill 0.9 pad 1.68)
  Top 0.406: v29.21,69.85 17.78,69.85 16.51,68.58 16.51,66.04 17.78,64.77 v44.45,64.77
  Bottom 0.406: IC6.3 27.94,71.12 v29.21,69.85 | v44.45,64.77 50.16,59.05 50.16,50.16 55.24,45.09 55.24,27.3 56.52,26.04 IC4.2
R4
  Bottom 0.406: IC6.4 30.48,73.66 29.21,74.93 22.86,74.93 21.59,73.66 21.59,71.12 26.67,66.04 35.56,66.04 44.45,57.15 44.45,21.59 49.53,16.51 58.42,16.51 59.69,17.78 59.69,20.95 61.59,22.86 61.59,27.3 60.96,27.94 59.69,27.94 IC4.3
R5
  Bottom 0.406: IC6.5 33.02,74.93 31.75,76.2 21.59,76.2 20.32,74.93 20.32,70.48 26.04,64.77 34.92,64.77 43.18,56.52 43.18,21.59 49.53,15.24 58.42,15.24 60.96,17.78 60.96,20.32 62.87,22.23 62.87,27.94 59.69,31.11 | 60.33,31.11 59.69,31.11 | 59.69,31.11 IC4.4
R6  (via drill 0.9 pad 1.68)
  Top 0.406: v8.89,77.47 v19.05,77.47 | v19.05,67.31 33.02,67.31 v35.56,69.85 | v8.89,83.82 5.08,80.01 5.08,22.86 11.43,16.51 59.69,16.51 62.23,19.05 62.23,33.02 v61.59,33.66
  Bottom 0.406: IC4.5 v61.59,33.66 | v8.89,83.82 v8.89,77.47 | v19.05,77.47 v19.05,67.31 | v35.56,69.85 IC6.6
R7  (via drill 0.9 pad 1.68)
  Top 0.406: v33.02,88.9 8.89,88.9 2.54,82.55 2.54,22.86 10.79,14.61 59.69,14.61 63.5,18.41 63.5,34.29 v61.59,36.2 | v38.1,69.85 39.37,68.58 49.53,68.58 50.8,69.85 50.8,80.01 v41.91,88.9
  Bottom 0.406: IC4.6 v61.59,36.2 | v33.02,88.9 v41.91,88.9 | v38.1,69.85 IC6.7
R8
  Bottom 0.406: IC6.8 40.64,71.12 52.07,59.69 52.07,50.8 54.61,48.26 54.61,47.62 56.52,45.72 56.52,40.01 57.78,38.73 IC4.7
SERIAL_DATA  (via drill 0.9 pad 1.68)
  Top 0.406: v67.31,113.03 60.96,106.68 49.53,106.68 46.99,104.14 46.99,90.17 49.53,87.63 v67.31,87.63
  Bottom 0.406: SL1.2 87.63,124.46 78.74,115.57 69.85,115.57 v67.31,113.03 | v67.31,87.63 67.31,87 66.67,86.36 IC1.14
SHCP  (via drill 0.8 pad 1.42, 0.9 pad 1.68)
  Top 0.406: v95.25,86.36 v74.93,86.36 | v48.9,36.2 47.62,36.2 46.99,35.56 45.72,35.56 44.45,34.29 44.45,29.21 40.64,25.4 | v25.4,40.64 31.75,40.64 33.02,39.37 33.02,26.67 34.29,25.4 40.64,25.4 | 40.64,25.4 40.64,39.37 44.45,43.18 v49.53,43.18 | v46.99,50.8 49.53,53.34 v66.67,53.34 | v81.28,41.91 87,41.91 88.27,40.64 v102.87,40.64
  Bottom 0.406: SL1.3 90.17,119.38 96.52,113.03 96.52,87.63 v95.25,86.36 | IC2.11 v25.4,40.64 | v74.93,86.36 74.93,85.72 74.3,85.09 IC1.11 74.3,79.38 72.39,77.47 57.15,77.47 55.88,76.2 55.88,74.93 66.04,64.77 66.04,57.15 71.12,52.07 | IC3.11 81.92,41.27 v81.28,41.91 | IC4.11 v48.9,36.2 | v49.53,43.18 49.53,48.26 v46.99,50.8 | 71.12,52.07 67.94,52.07 v66.67,53.34 | 71.12,52.07 72.39,50.8 87.63,50.8 88.27,51.44 102.23,51.44 102.87,50.8 v102.87,40.64
STCP  (via drill 0.8 pad 1.42, 0.9 pad 1.68)
  Top 0.406: v22.86,41.91 33.02,41.91 34.29,40.64 34.29,27.94 35.56,26.67 38.1,26.67 39.37,27.94 39.37,41.91 41.91,44.45 53.34,44.45 | v48.9,33.66 48.9,23.5 50.8,21.59 53.34,21.59 54.61,22.86 54.61,43.18 53.34,44.45 | v72.39,85.09 49.53,85.09 44.45,90.17 44.45,105.41 48.26,109.22 59.69,109.22 72.39,121.92 v92.71,121.92 v100.33,121.92 | 53.34,44.45 54.61,44.45 55.88,45.72 77.47,45.72 78.74,44.45 78.74,41.91 | 78.74,41.91 v78.74,40.64 78.74,41.27 | v101.6,73.66 v101.6,96.52 | 78.74,41.91 80.01,43.18 85.09,43.18 85.72,42.55 90.81,42.55 91.44,41.91 102.87,41.91 104.14,43.18 104.14,59.69 104.78,60.33 104.78,67.94 102.87,69.85 v101.6,69.85
  Bottom 0.406: SL1.4 v92.71,121.92 | IC2.12 v22.86,41.91 | IC4.12 v48.9,33.66 | v78.74,40.64 78.74,40.01 79.38,39.37 IC3.12 | v72.39,85.09 71.75,84.45 IC1.12 | v101.6,96.52 101.6,120.65 v100.33,121.92 | v101.6,73.66 v101.6,69.85